# EAGLE board pixy ESP daughter board v13 (EAGLE 9.7.0)
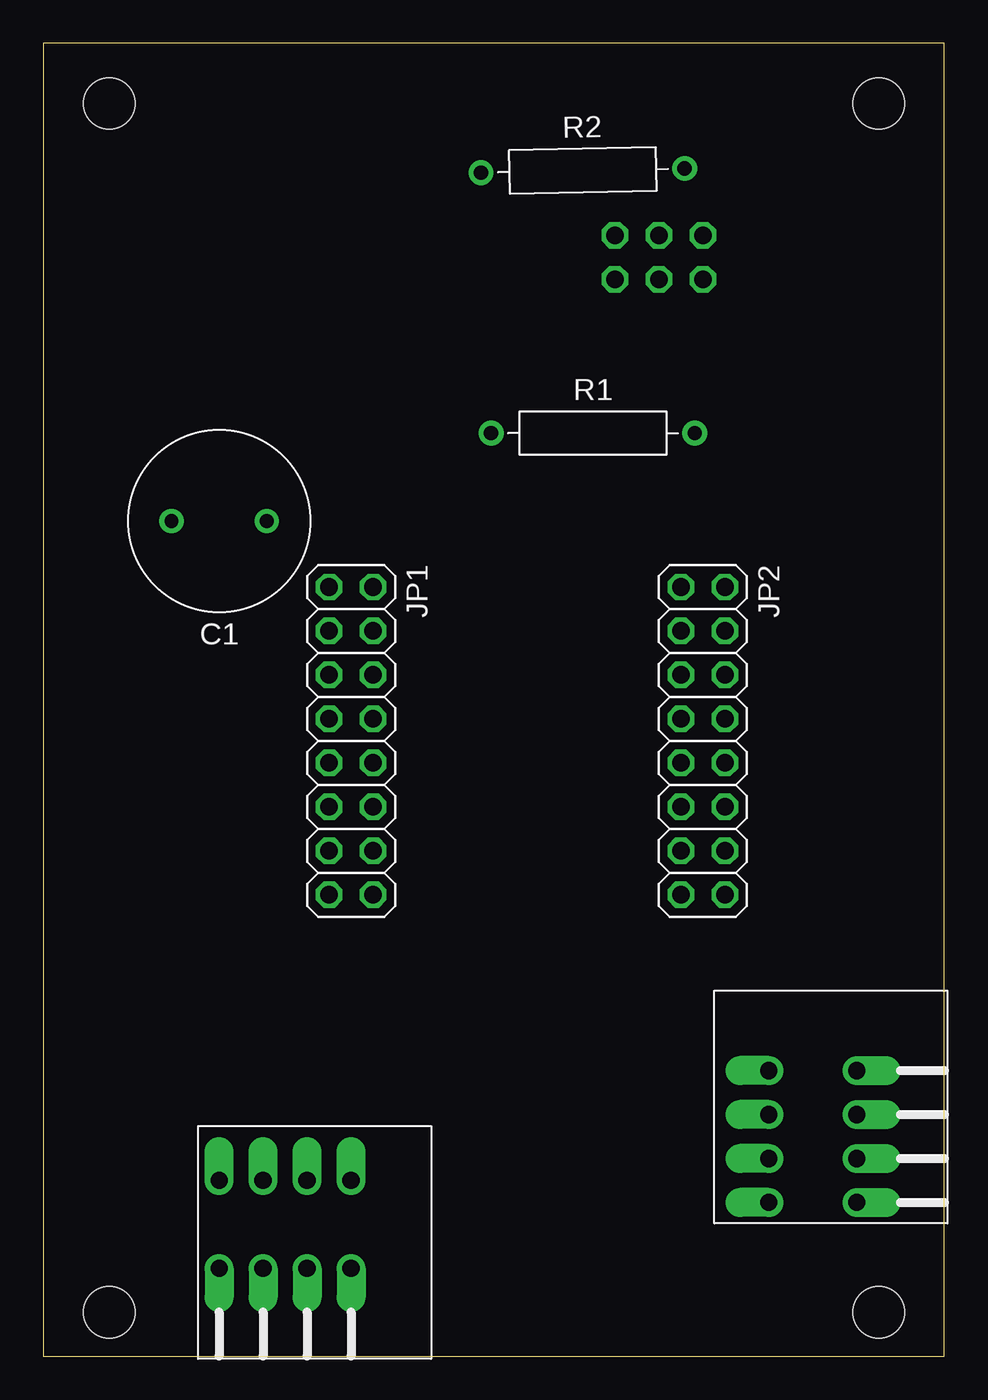
[diagram p0: board, top side]
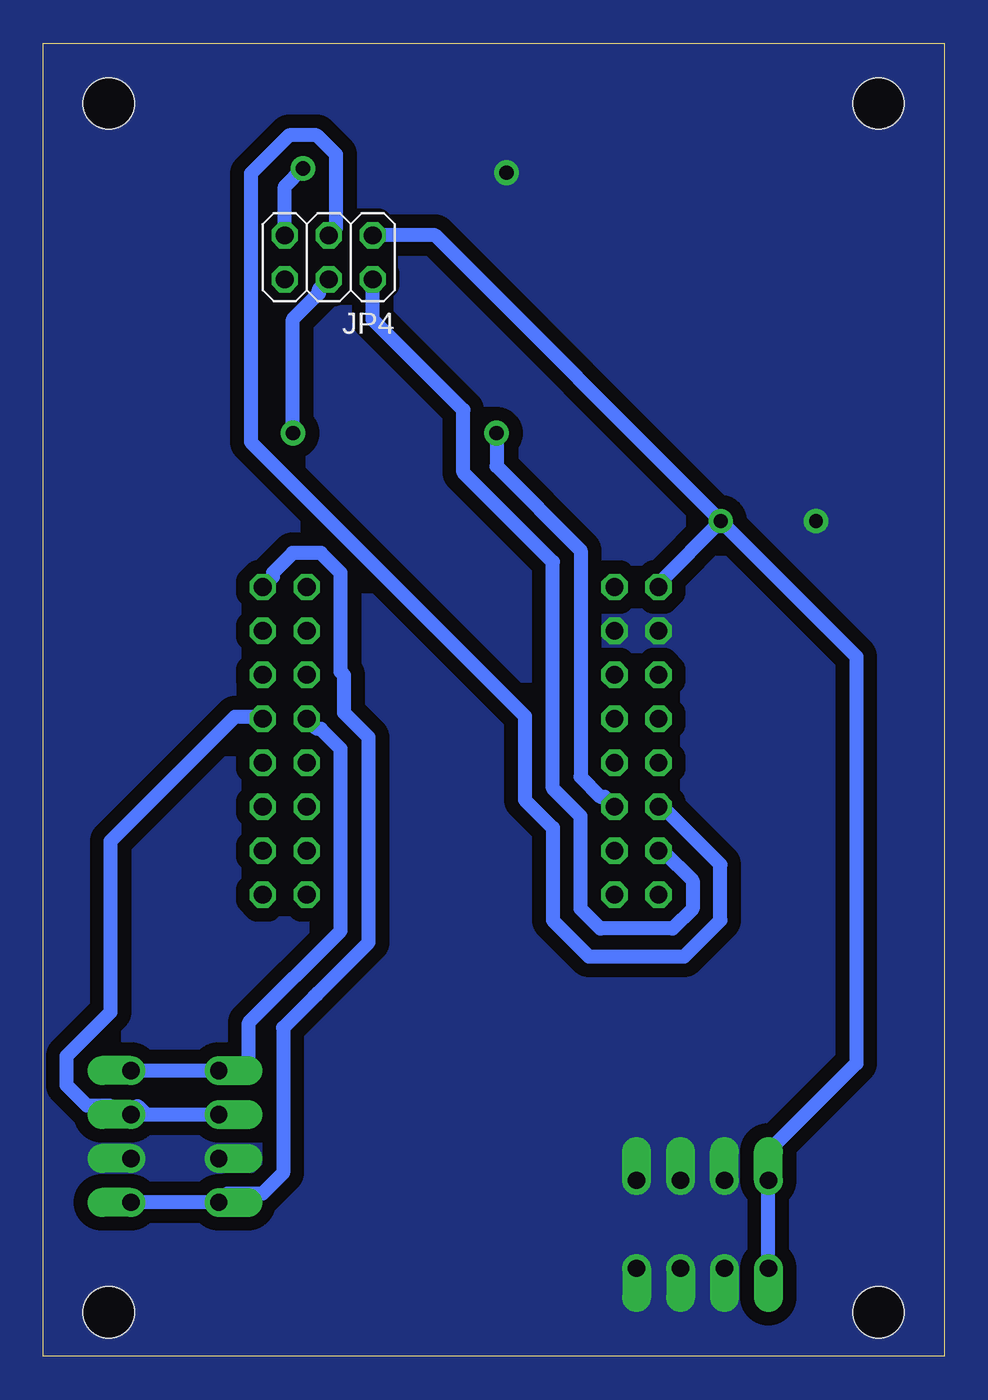
[diagram p1: board, bottom side, seen from below]

Size 52.05 x 75.87 mm. Coordinates in mm from the lower left corner, seen from the top.
Outline: 0,0 52.05,0 52.05,75.87 0,75.87 0,0
Copper layers (1*16): Top 0.035mm / dielectric 1.5mm / Bottom 0.035mm
Design rules "OthermillDRC_1_32_v2 *": minimum track width 32mil, minimum drill 0.8mm, track to track 0.794003125mm, track to pad 0.794003125mm, pad to pad 0.794003125mm, via to via 0.794003125mm, smd to smd 0mil, copper to edge 0mil, drill to drill 1mil, minimum pad ring 10mil, minimum via ring 10mil, stop-mask expansion 1mil, vias tented up to drill 30mil, thermal gap 10mil
Holes 2.95 mm at 3.81,2.54 48.26,2.54 48.26,72.39 3.81,72.39

## Footprints (pad centres in the part's own frame; a part is rotated, then mirrored left to right if it is on the bottom)
CAPRD550W60D1025H1250B = drill 0.8 pad 1.4: 1 -2.75,0; 2 2.75,0
2X08 = drill 1.016 octagon: 1 -8.89,-1.27; 2 -8.89,1.27; 3 -6.35,-1.27; 4 -6.35,1.27; 5 -3.81,-1.27; 6 -3.81,1.27; 7 -1.27,-1.27; 8 -1.27,1.27; 9 1.27,-1.27; 10 1.27,1.27; 11 3.81,-1.27; 12 3.81,1.27; 13 6.35,-1.27; 14 6.35,1.27; 15 8.89,-1.27; 16 8.89,1.27
2X03 = drill 1.016 octagon: 1 -2.54,-1.27; 2 -2.54,1.27; 3 0,-1.27; 4 0,1.27; 5 2.54,-1.27; 6 2.54,1.27
1-2834016-4 = drill 1 pad 1.676 offset: P$1 0,0; P$2 -5.08,0; P$3 0,-2.54; P$4 -5.08,-2.54; P$5 0,-5.08; P$6 -5.08,-5.08; P$7 0,-7.62; P$8 -5.08,-7.62
RESAD1176W63L850D250B = drill 0.83 pad 1.43: 1 -5.88,0; 2 5.88,0

## Placement (x,y rotation side)
C1  10u  [CAPRD550W60D1025H1250B]  10.16,48.26 180 top
JP1  PINHD-2X8  [2X08]  17.78,35.56 270 top
JP2  PINHD-2X8  [2X08]  38.1,35.56 270 top
JP4  PINHD-2X3  [2X03]  35.56,63.5 180 bottom
POWER_IN  TE_CONN_1-2834016-4  [1-2834016-4]  10.16,10.16 90 top
R1  0  [RESAD1176W63L850D250B]  31.75,53.34 0 top
R2  0  [RESAD1176W63L850D250B]  31.17,68.52 1.2 top
VL53L0X1  TE_CONN_1-2834016-4  [1-2834016-4]  41.91,8.89 180 top

## Library data of the parts
C1 = Capacitor; CATEGORY: Capacitor
JP1 JP2 = Connector; CATEGORY: Headers; DESCRIPTION: Header, Straight, 2x8 Position; MANUFACTURER: Generic; MPN: Generic; OPERATING_TEMPERATURE: Generic; PART_STATUS: Active; PITCH: 0.100" (2.54mm); ROHS_COMPLIANCE: Generic; SERIES: Generic; SUB-CATEGORY: Headers, Male Pins; TYPE: Board to Board or Cable, Unshrouded, Through Hole, Straight
JP4 = Connector; CATEGORY: Headers; DESCRIPTION: Header, Straight, 2x3 Position; MANUFACTURER: Generic; MPN: Generic; OPERATING_TEMPERATURE: Generic; PART_STATUS: Active; PITCH: 0.100" (2.54mm); ROHS_COMPLIANCE: Generic; SERIES: Generic; SUB-CATEGORY: Headers, Male Pins; TYPE: Board to Board or Cable, Unshrouded, Through Hole, Straight
POWER_IN = 1-2834016-4; N: POWER_IN
R1 R2 = Resistor; CATEGORY: Resistor; SUB-CATEGORY: Fixed
VL53L0X1 = 1-2834016-4; N: VL53L0X

## Nets
3V3: JP2.2 VL53L0X1.P$1 VL53L0X1.P$2
35: JP1.11 JP4.3
36: JP1.12 R1.1
36_PIXY: JP4.4 R1.2
37: JP1.13 JP4.2
GND: C1.2 JP1.3 JP1.4 POWER_IN.P$3 POWER_IN.P$4 POWER_IN.P$5 POWER_IN.P$6 POWER_IN.P$7 POWER_IN.P$8 R2.1 VL53L0X1.P$3 VL53L0X1.P$4
GND_PIXY: JP4.5 R2.2
SCL: JP2.8 VL53L0X1.P$5 VL53L0X1.P$6
SDA: JP2.7 VL53L0X1.P$7 VL53L0X1.P$8
VDD: C1.1 JP1.1 JP4.1 POWER_IN.P$1 POWER_IN.P$2

## Tracks (layer width: path | path; a pad name or v marks a point on that pad's centre or on a via)
3V3
  Bottom 0.813: JP2.2 38.79,45.03 38.79,45.26 37.64,46.41 36.02,46.41 34.87,45.26 34.87,39.55 34.68,39.36 34.68,37.18 33.26,35.77 33.26,23.92 36.21,20.97 | 36.41,20.77 36.21,20.97 | VL53L0X1.P$2 VL53L0X1.P$1 41.41,9.39 39.39,9.39 38.2,10.59 38.2,18.98 36.21,20.97
35
  Bottom 0.813: JP4.3 35.13,65.2 35.13,69.43 36.26,70.56 37.84,70.56 40.06,68.33 40.06,52.83 24.23,36.99 24.23,32.15 22.62,30.54 22.62,25.19 20.53,23.1 15.03,23.1 12.94,25.19 12.94,28.42 16.27,31.75 JP1.11
36
  Bottom 0.813: R1.1 25.87,51.42 21.01,46.57 21.01,33.48 19.86,32.33 19.63,32.33 JP1.12
36_PIXY
  Bottom 0.813: R1.2 37.63,59.92 36.14,61.42 36.14,61.65 JP4.4
37
  Bottom 0.813: JP4.2 33.02,59.91 27.79,54.67 27.79,51.07 22.62,45.9 22.62,32.81 21.01,31.2 21.01,25.86 19.86,24.71 15.7,24.71 14.55,25.86 14.55,27.48 16.27,29.21 JP1.13
GND
  pour Bottom (no thermals): -4.67,-4.67 58.01,-4.67 58.01,80.87 -4.67,80.87
GND_PIXY
  Bottom 0.813: JP4.5 38.1,67.59 R2.2
SCL
  Bottom 0.813: JP2.8 39.37,36.96 40.97,36.96 48.16,29.77 48.16,19.89 50.7,17.35 50.7,15.67 49.51,14.47 48.21,14.47 47.4,13.66 VL53L0X1.P$6 46.6,14.46 46.11,13.97 VL53L0X1.P$5
SDA
  Bottom 0.813: 47.4,16.87 VL53L0X1.P$8 VL53L0X1.P$7 40.4,16.51 40.17,16.74 40.17,19.28 34.87,24.58 34.87,35.1 36.02,36.25 36.25,36.25 JP2.7
VDD
  Bottom 0.813: C1.1 5.08,40.43 5.08,16.92 10.16,11.84 POWER_IN.P$1 POWER_IN.P$2 | C1.1 16.51,44.66 JP1.1 | C1.1 29.42,64.77 JP4.1